# Altium PCB BodyCaINseedv0.2.PcbDoc
Units mil, origin at the board's own origin, x right, y up, seen from the top; angles counter-clockwise.
Board outline 761 x 765 mil, 2 copper layers (Top Layer, Bottom Layer); 23 components, 17 nets, 77 pads, 23 vias.
Unrouted connection lines stored in the file: 56.
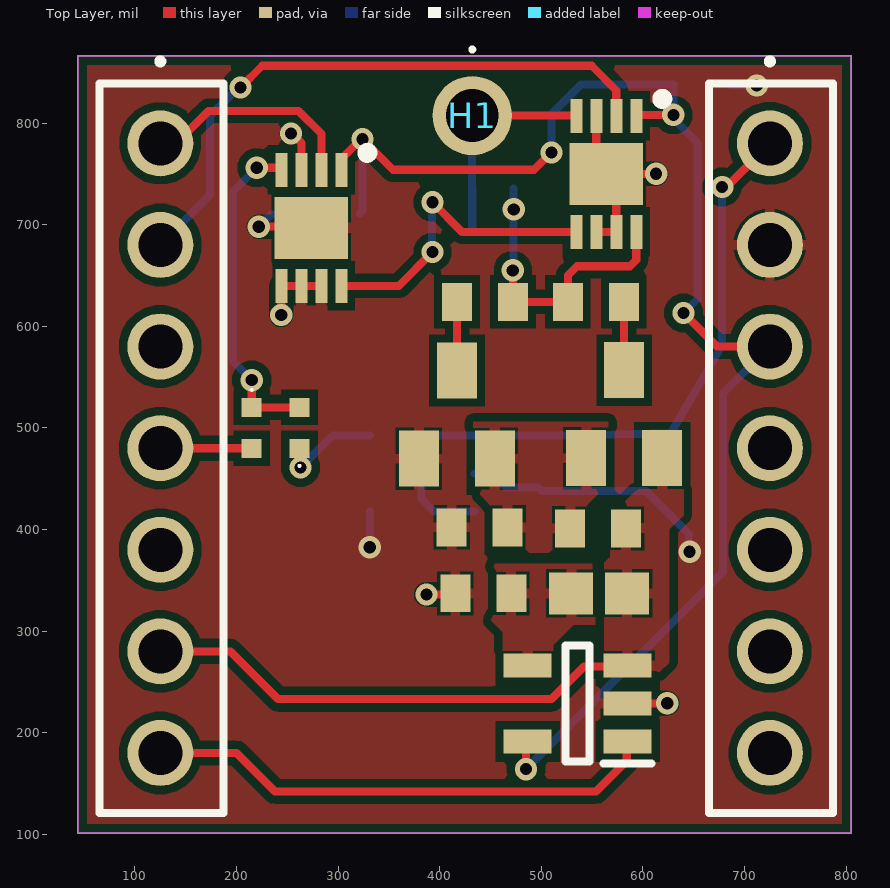
[diagram p0: Top Layer view]
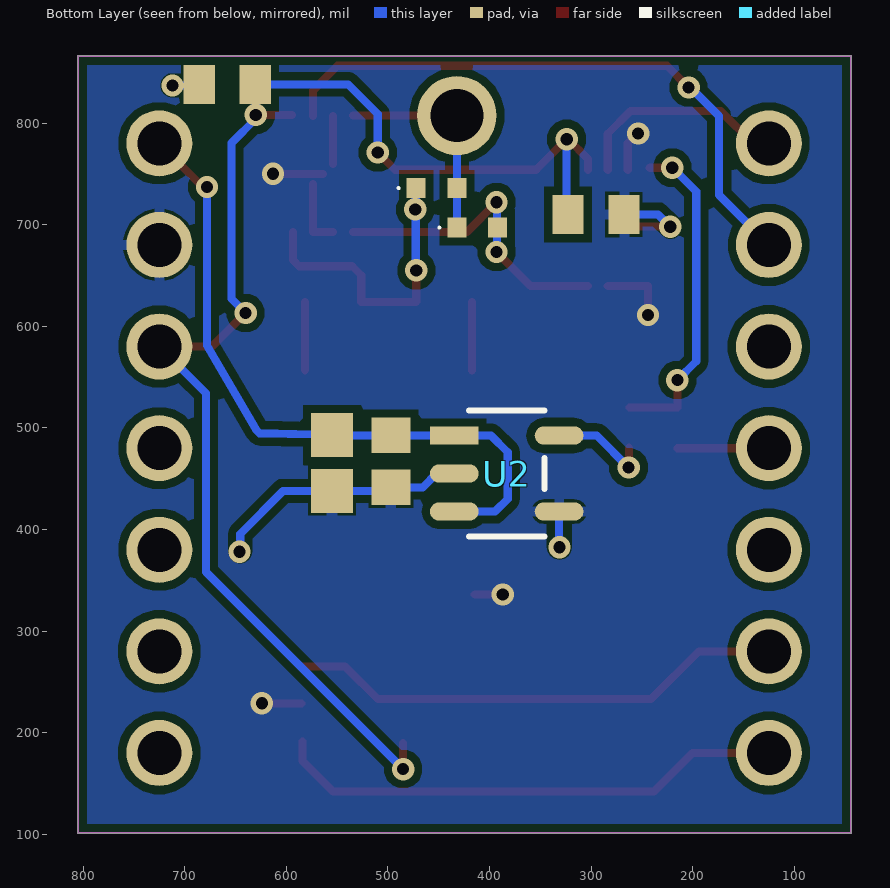
[diagram p1: Bottom Layer view, seen from below]
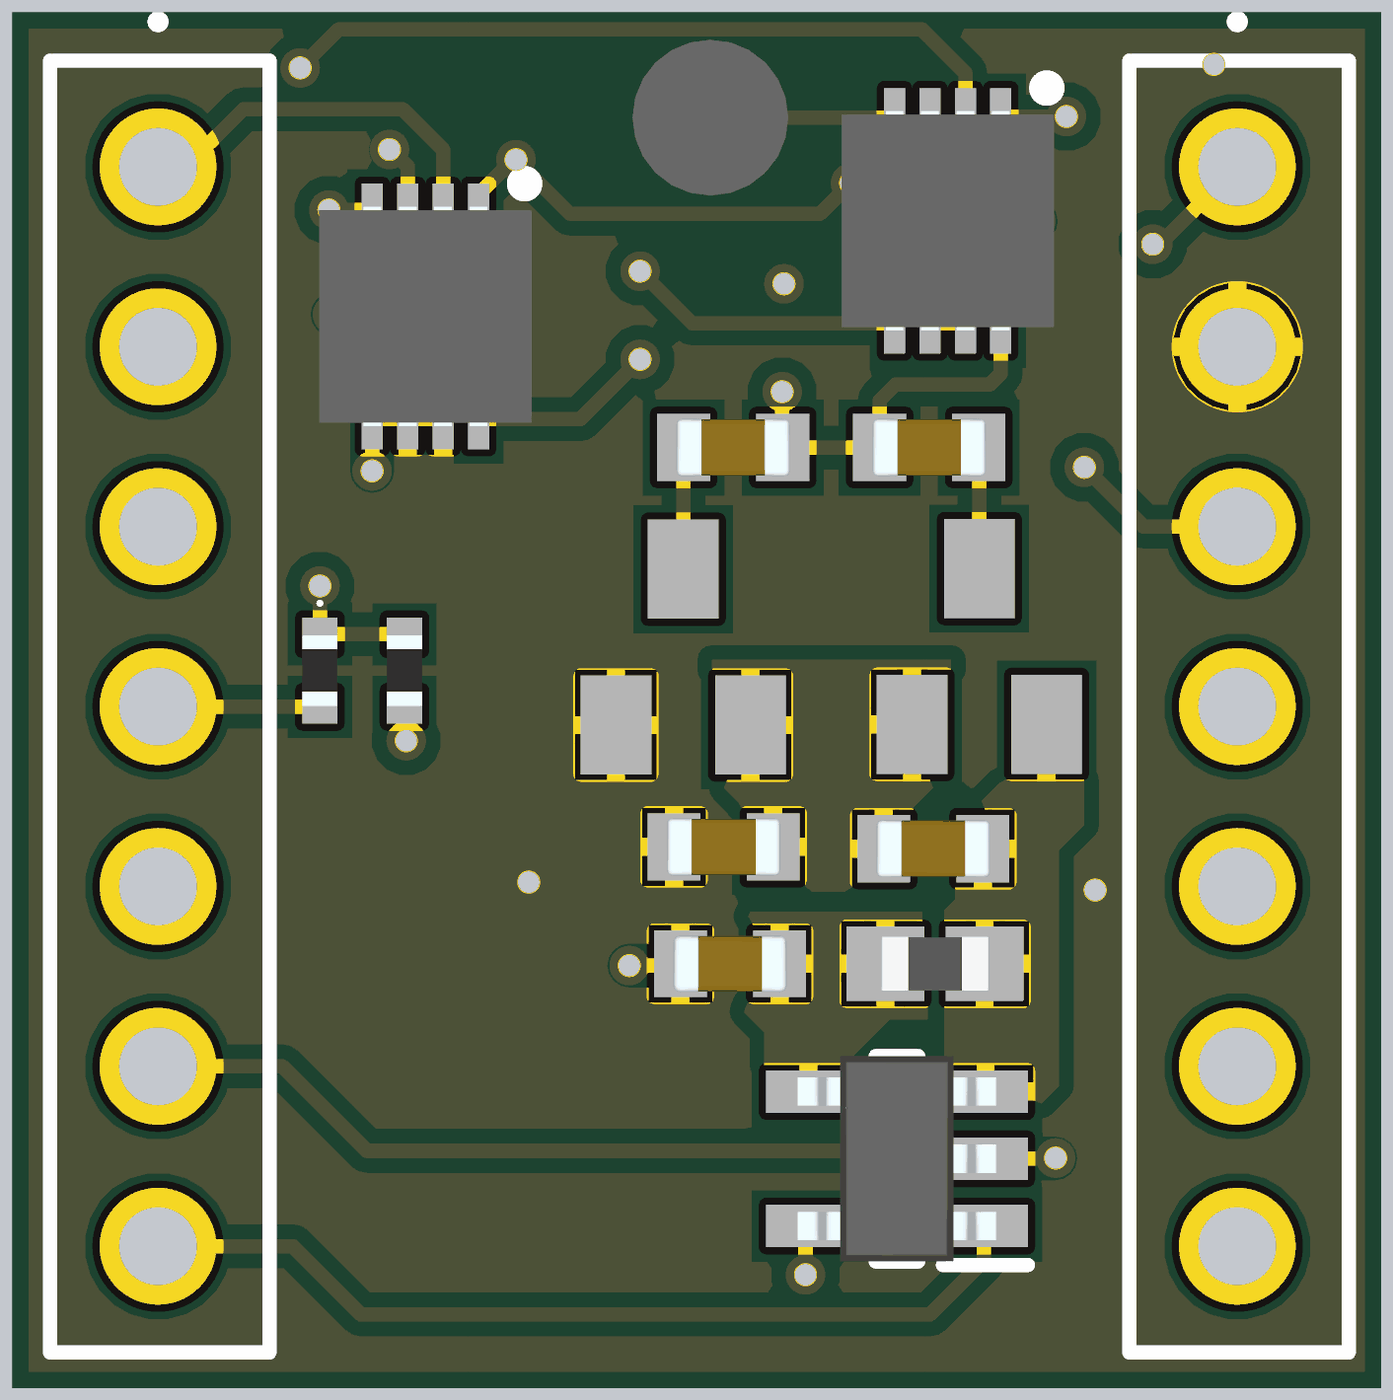
[diagram p2: 3D render of the assembled board from above, using the file's embedded part models]
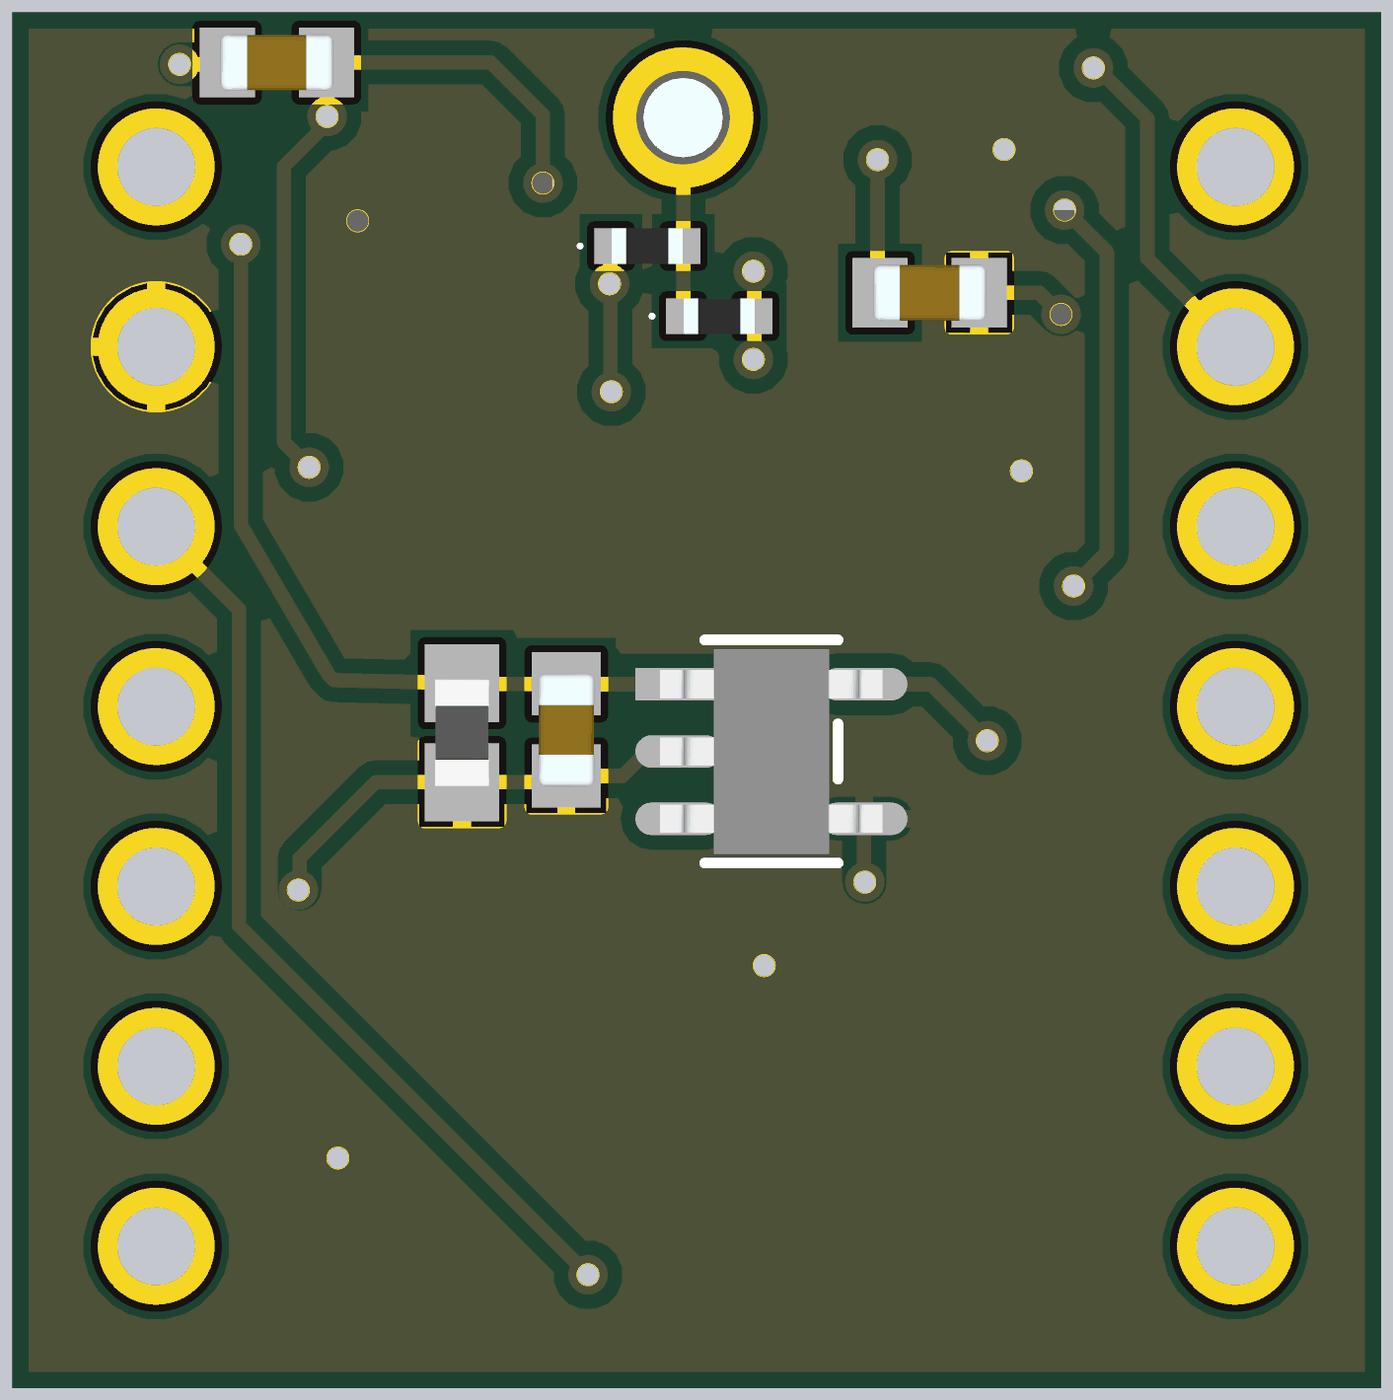
[diagram p3: 3D render of the assembled board from below, using the file's embedded part models]

## Layer stack, top to bottom
Top Solder: solder mask 0.4, Solder Resist, Dk 3.5
Top Layer: signal copper 1.4
Dielectric 1: dielectric 12.6, FR-4, Dk 4.8
Bottom Layer: signal copper 1.4
Bottom Solder: solder mask 0.4, Solder Resist, Dk 3.5

## Board outline
44,101 44,866 805,866 805,101

## Design rules (kind name [scope] priority, off if disabled: settings)
Clearance [All] p1: gap=6 ignorepadtopadclearanceinfootprint=TRUE except(0: Arc-Hole Track-Hole SMDPad-Hole THPad-Hole Via-Hole Fill-Hole Poly-Hole Region-Hole Text-Hole; 8: Arc-Fill Arc-Poly Arc-Region Track-Fill Track-Poly Track-Region SMDPad-Fill SMDPad-Poly SMDPad-Region THPad-Fill THPad-Poly THPad-Region Via-Fill Via-Poly Via-Region Fill-Fill Fill-Poly Fill-Region Poly-Poly Poly-Region Region-Region)
MinimumSolderMaskSliver [All] p1: minsoldermaskwidth=2
PolygonConnect [All] p1: thpad.connectstyle=Relief thpad.reliefconductorwidth=10 thpad.reliefentries=4 thpad.polygonreliefangle="90 Angle" thpad.airgapwidth=3 smdpad.connectstyle=Relief smdpad.reliefconductorwidth=10 smdpad.reliefentries=4 smdpad.polygonreliefangle="90 Angle" smdpad.airgapwidth=3 via.connectstyle=Direct via.reliefconductorwidth=10 via.reliefentries=4 via.polygonreliefangle="90 Angle" via.airgapwidth=10
RoutingVias [All] p1: holewidth=12 width=22 viastyle="Through Hole" minholewidth=12 minwidth=22 maxholewidth=28 maxwidth=50
SilkToSilkClearance [All] p1: silktosilkclearance=2
SilkToSolderMaskClearance [IsPad] p1: minsilkscreentomaskgap=2 clearancetoexposedcopper=TRUE
SolderMaskExpansion [All] p1: expansion=4 istentingtop=FALSE
SupplyNets "Schematic Supply Nets" [InNet('GND')] p1: voltage=0.000
Width [All] p1: maxlimit=20 minlimit=6 preferedwidth=8
27 further rules are at their usual default settings.

## Classes and differential pairs
component class BodyCaINseedv0.2: U2

## Components (designator, comment, footprint, x,y, rotation, side; value= is the part's Value field where it differs from the comment)
C1 "4.7 pF" CAPC1608X73N 556,401 r0 top
C2 "4.7 pF" CAPC1608X73N 553.73,624 r0 top
C3 "4.7 pF" CAPC1608X73N 444.73,624 r0 top
C4 "4.7 pF" CAPC1608X73N 439.44,402 r0 top
C5 "100nF" CAPC1608X90N 443,337 r0 top
C6 "100pF" CAPC1608X97N 658,838 r180 bottom
C7 "100pF" CAPC1608X97N 295,710 r0 bottom
C8 "0.1uF" CAPC1608X100N 497,467 r90 bottom
D1 "RB706F-40FHT106" SOT23 581.58,513.38 r0 top
D2 "RB706F-40FHT106" SOT23 417,513 r0 top
H1 "1528-1" 15281 432.09,807.37 r270 top
IC1 "TLV7031DBVR" SOT95P280X145-5N 535.79,228.6 r180 top
IC2 "ADG918BCPZ-REEL7" SON50P300X300X85-9N-D 564,750 r270 top
IC3 "ADG901SCPZ-EP-RL7" SON50P300X300X85-9N-D 273.68,696.83 r270 top
J4 "825433-7" 1725708 125,780 r270 top
J5 "825433-7" 1725708 725,780 r270 top
R2 "TBD" RESC1508X46N 557,337 r180 top
R4 "TBD" RESC1508X46N 555,465.44 r90 bottom
R5 "ERJ-2RKF1003X" ERJ2RKD1004X 215,500 r270 top
R6 "ERJ-2RKF1003X" ERJ2RKD1004X 262,500 r90 top
R7 "ERJ-2RKF1003X" ERJ2RKD1004X 412,697 r180 bottom
R8 "ERJ-2RKF1003X" ERJ2RKD1004X 452,736 r180 bottom
U2 "LTC6900IS5TRMPBF" S_5_ADI 383,455 r180 bottom

## Footprints (in the part's own frame and the unit in brackets; to place one, negate y for a bottom-side part, rotate by r counter-clockwise, add the part's x,y. Pads: shape width x height; smd on the part's side, far side on the other; paste and mask are expansions set on the pad)
15281 [mil]
  round 77.99 hole 52: 1(0,0)
  silkscreen extent -67,-2 -63,2, body extent -43,-43 43,43, height 103
1725708 [mm]
  round 1.65 hole 1.1: 1(0,0) 2(2.54,0) 3(5.08,0) 4(7.62,0) 5(10.16,0) 6(12.7,0) 7(15.24,0)
  silkscreen extent -2.1,-1.52 16.74,1.57
CAPC1608X73N [mm]
  rect 0.75x0.95 smd: 1(-0.7,0) 2(0.7,0)
  body extent -0.8,-0.41 0.8,0.41, height 0.73
CAPC1608X90N [mm]
  rect 0.75x0.94 smd: 1(-0.7,0) 2(0.7,0)
  body extent -0.8,-0.4 0.8,0.4, height 0.9
CAPC1608X97N [mm]
  rect 0.78x0.98 smd: 1(-0.7,0) 2(0.7,0)
  body extent -0.8,-0.4 0.8,0.4, height 0.97
CAPC1608X100N [mm]
  rect 0.89x0.98 smd: 1(-0.65,0) 2(0.65,0)
  body extent -0.8,-0.4 0.8,0.4, height 1
ERJ2RKD1004X [mm]
  rect 0.475x0.5 smd: 1(-0.512,0) 2(0.512,0)
  silkscreen extent -0.97,-0.03 -0.93,0.03, body extent -0.5,-0.25 0.5,0.25, height 0.35
RESC1508X46N [mm]
  rect 1.1x1.05 smd: 1(-0.7,0) 2(0.7,0)
  body extent -0.76,-0.38 0.76,0.38, height 0.36
S_5_ADI [mil]
  rect 48x18 smd paste+0 mask+0: 1(-51.57,37.4)
  oval 48x18 smd paste+0 mask+0: 2(-51.57,0) 3(-51.57,-37.4) 4(51.57,-37.4) 5(51.57,37.4)
  silkscreen extent -37,-62 37,62, body extent -62,-57 62,57, height 39
SON50P300X300X85-9N-D [mm]
  rect 0.85x0.3 smd: 1(-1.45,0.75) 2(-1.45,0.25) 3(-1.45,-0.25) 4(-1.45,-0.75) 5(1.45,-0.75) 6(1.45,-0.25) 7(1.45,0.25) 8(1.45,0.75)
  rect 1.55x1.84 smd: 9(0,0)
  silkscreen extent -2,1.28 -1.75,1.53, body extent -1.55,-1.5 1.55,1.5, height 0.85
SOT23 [mm]
  rect 1x1.4 smd: 1(-0.95,-1.1) 2(0.95,-1.1) 3(0,1.1)
SOT95P280X145-5N [mm]
  rect 1.2x0.6 smd: 1(-1.25,0.95) 2(-1.25,0) 3(-1.25,-0.95) 4(1.25,-0.95) 5(1.25,0.95)
  silkscreen extent -1.85,-1.45 0.3,1.5, body extent -1.4,-1.45 1.4,1.45, height 1.45

## Part data
C1 C2 C3 C4: library part 06035J4R7BBSTR, "Capacitor 06035J4R7BBSTR", Manufacturer_Name="Kyocera AVX", Mouser Part Number=581-06035J4R7BBS, Arrow Part Number=06035J4R7BBSTR, Arrow Price/Stock=https://www.arrow.com/en/products/06035j4r7bbstr/avx, Datasheet Link=https://datasheets.kyocera-avx.com/Accu-P.pdf, Height=0.73mm, Manufacturer_Part_Number=06035J4R7BBSTR, Mouser Price/Stock=https://www.mouser.com/Search/Refine.aspx?Keyword=581-06035J4R7BBS
C5: library part GCM188R71H103KA37J, "Capacitor GCM188R71H103KA37J", Manufacturer_Name="Murata Electronics", Mouser Part Number=81-GCM188R71H103KA7J, Arrow Part Number=GCM188R71H103KA37J, Arrow Price/Stock=https://www.arrow.com/en/products/gcm188r71h103ka37j/murata-manufacturing?region=nac, Datasheet Link=https://psearch.en.murata.com/capacitor/product/GCM188R71H103KA37%23.pdf, Height=0.9mm, Manufacturer_Part_Number=GCM188R71H103KA37J, Mouser Price/Stock=https://www.mouser.co.uk/ProductDetail/Murata-Electronics/GCM188R71H103KA37J?qs=N3Kl9KD794T3%2FxlXdF0Axg%3D%3D
C6 C7: library part VJ0603A101FXAAC, "Capacitor VJ0603A101FXAAC", Manufacturer_Name=Vishay, Mouser Part Number=77-VJ0603A101FXAAC, Arrow Part Number=VJ0603A101FXAAC, Arrow Price/Stock=https://www.arrow.com/en/products/vj0603a101fxaac/vishay?region=nac, Datasheet Link=http://www.vishay.com/docs/45226/vj31xrohsautomlcc.pdf, Height=0.97mm, Manufacturer_Part_Number=VJ0603A101FXAAC, Mouser Price/Stock=https://www.mouser.co.uk/ProductDetail/Vishay-Vitramon/VJ0603A101FXAAC?qs=S65kAjFE%2FJCNoIVW2knBSg%3D%3D
C8: library part C0603X104K1RACTU, "CapacitorC0603X104K1RACTU", Manufacturer_Name=KEMET, Datasheet Link=https://search.kemet.com/component-documentation/download/specsheet/C0603X104K1RACTU, Height=1mm, Manufacturer_Part_Number=C0603X104K1RACTU
D1 D2: library part DIODE_2CACA-SOT23, "2 Diodes - Cathode-Anode", DeviceName=SOT23, DeviceSetName=DIODE_2CACA-, GateName_1=-B1, LibraryName=diode, POPULARITY=1, SymbolName_1=KA2KA
H1: "Hardware", Manufacturer_Name="Keystone Electronics", Mouser Part Number=534-1528-1, Datasheet Link=https://www.keyelco.com/product-pdf.cfm?p=3317, Height=2.51mm, Manufacturer_Part_Number=1528-1, Mouser Price/Stock=https://www.mouser.com/Search/Refine.aspx?Keyword=534-1528-1
IC1: "Integrated Circuit", Manufacturer_Name="Texas Instruments", Mouser Part Number=595-TLV7031DBVR, Arrow Part Number=TLV7031DBVR, Arrow Price/Stock=https://www.arrow.com/en/products/tlv7031dbvr/texas-instruments?region=nac, Datasheet Link=http://www.ti.com/lit/gpn/TLV7031, Height=1.45mm, Manufacturer_Part_Number=TLV7031DBVR, Mouser Price/Stock=https://www.mouser.co.uk/ProductDetail/Texas-Instruments/TLV7031DBVR?qs=EBDBlbfErPzxbC0zg598sw%3D%3D
IC2: "Integrated Circuit", Manufacturer_Name="Analog Devices", Mouser Part Number=584-ADG918BCPZ-R7, Arrow Part Number=ADG918BCPZ-REEL7, Arrow Price/Stock=https://www.arrow.com/en/products/adg918bcpz-reel7/analog-devices?region=nac, Datasheet Link=http://www.analog.com/media/en/technical-documentation/data-sheets/ADG918_919.pdf, Height=0.85mm, Manufacturer_Part_Number=ADG918BCPZ-REEL7, Mouser Price/Stock=https://www.mouser.co.uk/ProductDetail/Analog-Devices/ADG918BCPZ-REEL7?qs=BpaRKvA4VqEK8oT2sWj1IQ%3D%3D
IC3: "Integrated Circuit", Manufacturer_Name="Analog Devices", Mouser Part Number=584-ADG901SCPZEPRL7, Arrow Part Number=ADG901SCPZ-EP-RL7, Arrow Price/Stock=https://www.arrow.com/en/products/adg901scpz-ep-rl7/analog-devices?region=nac, Datasheet Link=https://www.analog.com/media/en/technical-documentation/data-sheets/ADG901-EP.pdf, Height=0.85mm, Manufacturer_Part_Number=ADG901SCPZ-EP-RL7, Mouser Price/Stock=https://www.mouser.co.uk/ProductDetail/Analog-Devices/ADG901SCPZ-EP-RL7?qs=S8zVn2bBIh8DlciUwzRt2A%3D%3D
J4 J5: "Connector", Manufacturer_Name="TE Connectivity", Mouser Part Number=571-825433-7, Arrow Part Number=825433-7, Arrow Price/Stock=https://www.arrow.com/en/products/825433-7/te-connectivity?region=nac, Datasheet Link=https://www.te.com/commerce/DocumentDelivery/DDEController?Action=srchrtrv&DocNm=825433&DocType=Customer+Drawing&DocLang=English&DocFormat=pdf&PartCntxt=825433-7, Height=9.9mm, Manufacturer_Part_Number=825433-7, Mouser Price/Stock=https://www.mouser.co.uk/ProductDetail/TE-Connectivity/825433-7?qs=Yxch5oR%2FTsMBxkkF1vNhLA%3D%3D
R2 R4: library part WSL060300000ZEA9, "Resistor WSL060300000ZEA9", Manufacturer_Name=Vishay, Mouser Part Number=71-WSL060300000ZEA9, Arrow Part Number=WSL060300000ZEA9, Arrow Price/Stock=https://www.arrow.com/en/products/wsl060300000zea9/vishay?region=nac, Datasheet Link=http://www.vishay.com/docs/30192/wsl-9.pdf, Height=0.457mm, Manufacturer_Part_Number=WSL060300000ZEA9, Mouser Price/Stock=https://www.mouser.co.uk/ProductDetail/Vishay-Dale/WSL060300000ZEA9?qs=Q7nJoqLg%252BZgzeflh6I0jJw%3D%3D
R5 R6 R7 R8: "Resistor", Manufacturer_Name=Panasonic, Mouser Part Number=667-ERJ-2RKF1003X, Arrow Part Number=ERJ-2RKF1003X, Arrow Price/Stock=https://www.arrow.com/en/products/erj-2rkf1003x/panasonic?region=europe, Datasheet Link=https://industrial.panasonic.com/cdbs/www-data/pdf/RDA0000/AOA0000C86.pdf, Height=0.4mm, Manufacturer_Part_Number=ERJ-2RKF1003X, Mouser Price/Stock=https://www.mouser.co.uk/ProductDetail/Panasonic/ERJ-2RKF1003X?qs=H7k1u0Mp9JQnXoBKdf15Qg%3D%3D
U2: "No Description Available", Mfr_Name="Analog Devices Inc", RefDes=RefDes, Type=Type

## Via types
v1: diameter 22, hole 12, Top Layer to Bottom Layer, tented both sides, 23 vias

## Nets (pads, with @x,y where several pads share a name; then routed paths per layer and width w, separated by ;. In a path a pad name is that pad's centre, name@x,y a point inside that pad or via, vN(x,y) a via of type N, cw(c..) or ccw(c..) an arc to the next point about the centre after c; other vN are vias at no path point)
3V3: C6.2 C7.2 IC1.5 IC2.1 IC3.1 J5.3 | length 1403.2
  Top Layer w8: IC3.1@303.11,754.02 303.11,764.63 v1@322.47,784 ; v1(324,784) 354,754 493,754 v1(510,771) ; v1(484.95,164.13) IC1.5@484.95,189.57 ; IC2.1@594.44,808 v1(630,808) ; v1(640,613) 673,580 J5.3
  Bottom Layer w8: C7.2@321.56,711 324,713.44 v1(324,784) ; v1(484.95,164.13) 679,358.18 679,534 J5.3 ; v1(510,771) 510,809 539,838 C6.2 ; C6.2@630,837.56 v1(630,808) 630,804.21 654,780.21 654,627 v1(640,613)
Antenna: H1.1 IC2.4 R7.1 R8.2 | length 211.9
  Top Layer w8: H1.1 IC2.4@534.19,807.37
  Bottom Layer w8: R8.2@431.97,736.12 H1.1@431.97,807.25 ; R7.1@432,697.16 R8.2@432,735.84
CompRef: C5.2 IC1.4 R2.2
GND: C4.1 C5.1 C6.1 C7.1 C8.1 D2.1 IC1.2 IC2.3 IC2.6 IC2.7 IC2.9 IC3.3 IC3.5 IC3.6 IC3.7 IC3.9 J5.2 R4.1 U2.2 U2.4 | length 753
  Top Layer w8: v1(222,698) 272.51,698 IC3.9 ; v1(244,611) 244.08,611.08 244.08,639.66 IC3.5 IC3.6 IC3.7 ; v1@254.35,789.65 263.84,780.16 IC3.3 ; v1(387,336) C5.1@414.44,336 ; IC2.6 IC2.7 IC2.9@573.84,740.16 ; IC2.9@554.16,759.84 IC2.3 ; IC2.9 v1(613,750) ; IC1.2 585.2,228.8 v1@623.8,228.8
  Bottom Layer w8: v1(222,698) 234,710 C7.1 ; v1(331.09,382.4) 331.43,382.73 U2.4 ; U2.2 452.09,455 465.68,441.41 C8.1 500.53,437.88 R4.1 603.12,437.88 645.32,395.68 v1@645.32,378.68 ; C6.1@686.56,837 v1(712,837)
  other v1: 624,229 646,378 253.65,789.65
NetC1_1: C1.1 C4.2 D1.1 D2.2
NetC2_2: C2.2 D1.3 | length 67
  Top Layer w8: D1.3 C2.2@581.58,623.71
NetC3_1: C3.1 D2.3 | length 67.5
  Top Layer w8: D2.3@417.17,556.48 C3.1
PWM: J4.4 R5.2 | length 90
  Top Layer w8: J4.4@125.08,479.92 214.92,479.92 R5.2
Rx_analog: C1.2 D1.2 IC1.3 J4.6 R2.1 | length 491.8
  Top Layer w8: J4.6 194,280 241,233 510,233 542.06,265.06 IC1.3@584.06,265.06
Rx_GPIO: IC1.1 J4.7 | length 506.4
  Top Layer w8: J4.7 200,180 238,142 554,142 584.07,172.07 IC1.1@584.07,191.2
RxRadio: C2.1 C3.2 IC2.8 R8.1 | length 291
  Top Layer w8: C3.2@472,624.29 v1(472,655) ; C3.2 C2.1 526.17,650.17 535,659 587.31,659 593.53,665.21 IC2.8
  Bottom Layer w8: v1@472.5,655.66 v1@472.5,714.5 ; v1@472.58,715.42 R8.1@472.58,735.58
  other v1: 473,715
T/Rsw: IC2.2 J4.2 | length 600.7
  Top Layer w8: v1(204,835) 225.37,856.37 549.63,856.37 573.84,832.16 IC2.2
  Bottom Layer w8: J4.2 174,729 174,807 v1@202,835
TxRadio: IC2.5 IC3.8 R7.2 | length 304.9
  Top Layer w8: IC3.8 359.74,639.74 v1(393,673) ; v1(393,722) 422.09,692.91 IC2.5
  Bottom Layer w8: R7.2@392.42,697.08 v1@392.42,721.42 ; v1@392.5,673.5 R7.2@392.5,697
txRadioOUT: IC3.4 R5.1 R6.2 | length 322.5
  Top Layer w8: v1(215,547) R5.1 R6.2 ; v1(220,756) IC3.4@242.25,756
  Bottom Layer w8: v1(215,547) 196.49,565.51 196.49,732.49 v1(220,756)
txRadioSW: IC3.2 J4.1 | length 216.7
  Top Layer w8: J4.1 140.41,780 172.41,812 261,812 283.53,789.47 IC3.2
V5V: C8.2 J5.1 R4.2 U2.1 U2.3 | length 676
  Top Layer w8: v1(678,737) 680.68,739.68 684.68,739.68 J5.1
  Bottom Layer w8: U2.3 394.4,417.6 382,430 382,476 398.4,492.4 496.81,492.4 C8.2 R4.2@554.59,492.59 ; R4.2 571.67,493.39 626.21,494.68 629.2,497.67 678,580.98 v1(678,737)
VCOutput: R6.1 U2.5 | length 100.3
  Top Layer w8: v1@262.5,461.5 R6.1@262.5,480.34
  Bottom Layer w8: v1(263,461) 294.4,492.4 U2.5
pads on no net: J4.3 J4.5 J5.4 J5.5 J5.6 J5.7

## Polygon pours and split planes (outlines as drawn)
GND on Top Layer "GND_L01_P003" (solid, remove dead copper, pour order 3): 43,868 804,868 804,100 43,100
Rx_analog on Top Layer "RX_ANALOG_L01_P002" (solid, remove dead copper, pour order 2): 594,503 641,503 641,440 640,439 640,414 626,400 626,269 603,246 562,246 562,367 568,373 568,425 580,425 594,439
CompRef on Top Layer "COMPREF_L01_P001" (solid, remove dead copper, pour order 1): 451,366 550,366 550,361 554,357 553,356 553,306 532,306 512,286 512,254 507,249 462,249 462,299 451,310
NetC1_1 on Top Layer "NETC1_1_L01_P000" (solid, remove dead copper, pour order 0): 433,506 566,506 566,445 545,424 545,380 542,377 453,377 448,382 448,426 433,441
GND on Bottom Layer "GND_L02_P004" (solid, remove dead copper, pour order 4): 44,866 805,866 805,98 44,98

## Keep-outs
Keep-Out Layer:
  the board outline again, w2